# EAGLE board Schema (EAGLE 9.6.2)
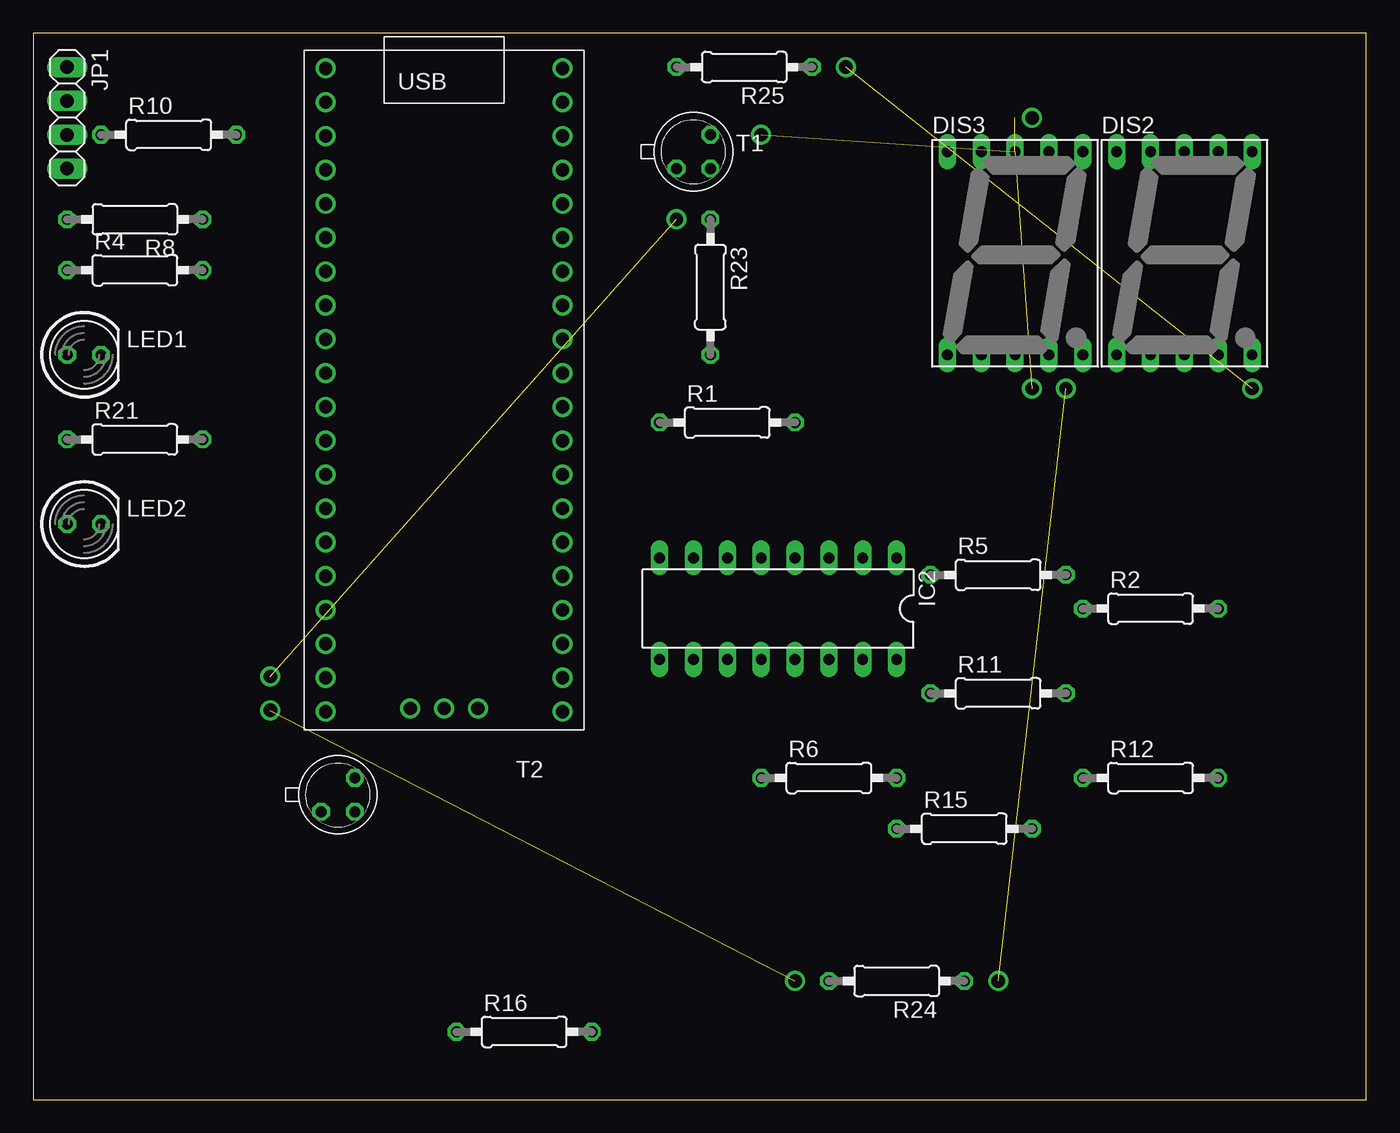
[diagram p0: board, top side]
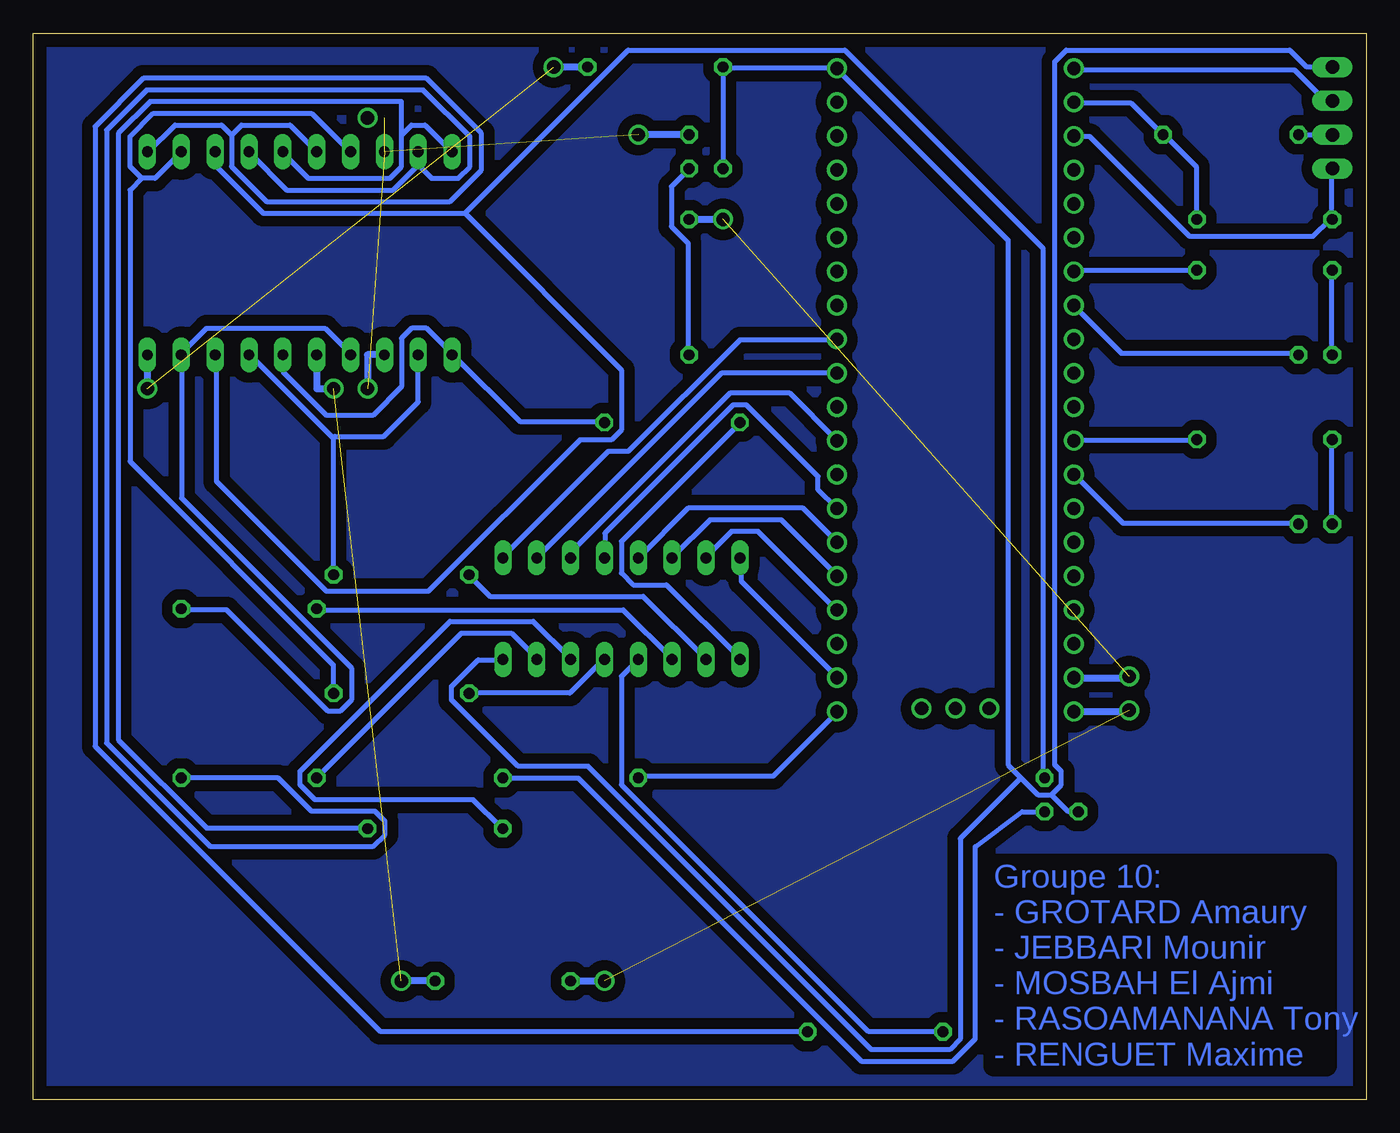
[diagram p1: board, bottom side, seen from below]

Size 100 x 80 mm. Coordinates in mm from the lower left corner, seen from the top.
Outline: 0,0 100,0 100,80 0,80 0,0
Copper layers (1*16): Top 0.035mm / dielectric 1.5mm / Bottom 0.035mm
Design rules "default *": minimum track width 15mil, minimum drill 0.35mm, track to track 15mil, track to pad 15mil, pad to pad 15mil, via to via 15mil, smd to smd 6mil, copper to edge 40mil, drill to drill 6mil, minimum pad ring 10mil, minimum via ring 8mil, stop-mask expansion 4mil, vias tented up to drill 0mil, thermal gap 10mil

## Footprints (pad centres in the part's own frame; a part is rotated, then mirrored left to right if it is on the bottom)
HDSP-M = drill 0.813 long: 1 -5.08,-7.62; 2 -2.54,-7.62; 3 0,-7.62; 4 2.54,-7.62; 5 5.08,-7.62; 6 5.08,7.62; 7 2.54,7.62; 8 0,7.62; 9 -2.54,7.62; 10 -5.08,7.62
DIL16 = drill 0.813 long: 1 -8.89,-3.81; 2 -6.35,-3.81; 3 -3.81,-3.81; 4 -1.27,-3.81; 5 1.27,-3.81; 6 3.81,-3.81; 7 6.35,-3.81; 8 8.89,-3.81; 9 8.89,3.81; 10 6.35,3.81; 11 3.81,3.81; 12 1.27,3.81; 13 -1.27,3.81; 14 -3.81,3.81; 15 -6.35,3.81; 16 -8.89,3.81
1X04 = drill 1.016 long: 1 -3.81,0; 2 -1.27,0; 3 1.27,0; 4 3.81,0
LED5MM = drill 0.813 octagon: A -1.27,0; K 1.27,0
0207/10 = drill 0.813 octagon: 1 -5.08,0; 2 5.08,0
TO18 = drill 0.813 octagon: 1 -1.27,-1.27; 2 1.27,-1.27; 3 1.27,1.27
FT_RASPBERRY-PI-PICO_TH = drill 1: 1 -8.55,24.03; 2 -8.55,21.49; 3 -8.55,18.95; 4 -8.55,16.41; 5 -8.55,13.87; 6 -8.55,11.33; 7 -8.55,8.79; 8 -8.55,6.25; 9 -8.55,3.71; 10 -8.55,1.17; 11 -8.55,-1.37; 12 -8.55,-3.91; 13 -8.55,-6.45; 14 -8.55,-8.99; 15 -8.55,-11.53; 16 -8.55,-14.07; 17 -8.55,-16.61; 18 -8.55,-19.15; 19 -8.55,-21.69; 20 -8.55,-24.23; 21 9.23,-24.23; 22 9.23,-21.69; 23 9.23,-19.15; 24 9.23,-16.61; 25 9.23,-14.07; 26 9.23,-11.53; 27 9.23,-8.99; 28 9.23,-6.45; 29 9.23,-3.91; 30 9.23,-1.37; 31 9.23,1.17; 32 9.23,3.71; 33 9.23,6.25; 34 9.23,8.79; 35 9.23,11.33; 36 9.23,13.87; 37 9.23,16.41; 38 9.23,18.95; 39 9.23,21.49; 40 9.23,24.03; GND 0.34,-24; SWCLK -2.2,-24; SWDIO 2.88,-24

## Placement (x,y rotation side)
DIS2  HD-H101  [HDSP-M]  86.36,63.5 0 top
DIS3  HD-H101  [HDSP-M]  73.66,63.5 0 top
IC2  [DIL16]  55.88,36.83 180 top
JP1  [1X04]  2.54,73.66 270 top
LED1  [LED5MM]  3.81,55.88 0 top
LED2  [LED5MM]  3.81,43.18 0 top
R1  [0207/10]  52.07,50.8 0 top
R2  [0207/10]  83.82,36.83 0 top
R4  [0207/10]  7.62,62.23 0 top
R5  [0207/10]  72.39,39.37 0 top
R6  [0207/10]  59.69,24.13 0 top
R8  [0207/10]  7.62,66.04 180 top
R10  [0207/10]  10.16,72.39 0 top
R11  [0207/10]  72.39,30.48 0 top
R12  [0207/10]  83.82,24.13 0 top
R15  [0207/10]  69.85,20.32 0 top
R16  [0207/10]  36.83,5.08 0 top
R21  [0207/10]  7.62,49.53 0 top
R23  [0207/10]  50.8,60.96 270 top
R24  [0207/10]  64.77,8.89 180 top
R25  [0207/10]  53.34,77.47 180 top
T1  2N2222  [TO18]  49.53,71.12 0 top
T2  2N2222  [TO18]  22.86,22.86 0 top
U$1  RASPBERRY-PI-PICO_TH  [FT_RASPBERRY-PI-PICO_TH]  30.48,53.34 0 top

## Library data of the parts
DIS2 DIS3 = display-hp; OC_FARNELL: unknown; OC_NEWARK: unknown
IC2 = ic-package
JP1 = pinhead
LED1 LED2 = led
R1 R2 R4-R6 R8 R10-R12 R15 R16 R21 R23-R25 = rcl; SPICEPREFIX: R
T1 T2 = transistor
U$1 = pipico

## Nets
9E: DIS2.1 DIS3.1 R1.2
10D: DIS2.2 DIS3.2 R5.2
11C: DIS2.4 DIS3.4 R2.2
12B: DIS2.6 DIS3.6 R16.2
13A: DIS2.7 DIS3.7 R11.2
14G: DIS2.10 DIS3.10 R15.2
15F: DIS2.9 DIS3.9 R12.2
19TOTR: R23.1 U$1.19
DOT: R24.2 U$1.20
N$1: IC2.8 U$1.22
N$2: JP1.4 R8.2 U$1.3
N$3: R8.1 R10.2 U$1.2
N$4: JP1.2 U$1.1
N$5: JP1.3 R10.1
N$6: R4.2 U$1.7
N$7: LED1.A R4.1
N$8: LED1.K U$1.8
N$9: IC2.1 U$1.32
N$10: IC2.2 U$1.31
N$11: IC2.7 U$1.24
N$12: IC2.6 U$1.25
N$13: IC2.5 U$1.26
N$14: IC2.4 U$1.27
N$15: IC2.3 U$1.29
N$16: IC2.15 R12.1
N$17: IC2.14 R15.1
N$18: R6.1 U$1.21
N$19: IC2.13 R11.1
N$20: IC2.12 R16.1
N$21: IC2.11 R2.1
N$22: IC2.10 R5.1
N$23: IC2.9 R1.1
N$24: R23.2 T1.2
N$25: DIS3.3 DIS3.8 T1.3
N$26: R21.2 U$1.12
N$27: LED2.A R21.1
N$28: LED2.K U$1.13
N$29: DIS2.3 DIS2.8 T2.3
N$30: R6.2 T2.2
N$31: DIS2.5 R25.1
N$33: DIS3.5 R24.1
VCC: IC2.16 JP1.1 R25.2 T1.1 T2.1 U$1.40

## Tracks (layer width: path | path; a pad name or v marks a point on that pad's centre or on a via)
9E
  Bottom 0.381: R1.2 57.25,50.88 63.5,50.88 68.5,55.88 DIS3.1 68.62,56 70.5,57.88 71.62,57.88 72.38,57.12 72.38,53.48 74.52,51.34 77.98,51.34 81.28,54.63 DIS2.1
10D
  Bottom 0.381: 77.5,49.62 77.5,39.38 R5.2 | 77.5,49.62 83.75,55.88 DIS2.2 | DIS3.2 71.12,52.34 73.71,49.75 77.38,49.75 77.5,49.62
11C
  Bottom 0.381: DIS3.4 76.25,56 78.12,57.88 87,57.88 88.88,56 DIS2.4 88.88,55.75 88.88,45.12 76.12,32.38 76.12,30 77,29.12 77.88,29.12 85.5,36.75 88.88,36.75 R2.2
12B
  Bottom 0.381: 85.12,72.38 85.12,70 82.5,67.38 68.75,67.38 66.38,69.75 66.38,72.5 70.5,76.62 91.75,76.62 95.38,73 95.38,26.5 74,5.12 42,5.12 R16.2 | 85.12,72.38 85.88,73.12 89.38,73.12 91.38,71.12 DIS2.6 | 85.12,72.38 84.38,73.12 80.75,73.12 DIS3.6
13A
  Bottom 0.381: 91.88,69.12 92.75,70 92.75,72.25 91,74 79.12,74 76.25,71.12 DIS3.7 | 91.88,69.12 90.88,69.12 89,71 DIS2.7 | 91.88,69.12 92.75,68.25 92.75,47.88 77.5,32.62 77.5,30.5 R11.2
14G
  Bottom 0.381: 72.38,72.38 71.62,73.12 70.62,73.12 68.62,71.12 DIS3.10 | 72.38,72.38 72.38,70 73.25,69.12 79.38,69.12 81.25,71 DIS2.10 | 72.38,72.38 72.38,74.88 91.25,74.88 93.62,72.5 93.62,27 87,20.38 75,20.38 R15.2
15F
  Bottom 0.381: DIS2.9 83.75,71 81,68.25 73,68.25 71.12,70.12 71.12,71 DIS3.9 71,70 70.12,69.12 68.12,69.12 67.25,70 67.25,72.25 70.75,75.75 91.5,75.75 94.5,72.75 94.5,26.75 86.75,19 74.5,19 73.62,19.88 73.62,20.88 74.38,21.62 79.12,21.62 81.62,24.12 88.88,24.12 R12.2
19TOTR  (1 unrouted)
  Bottom 0.508: R23.1 48.26,66.04 | U$1.19 17.78,31.65 17.78,31.75
DOT  (1 unrouted)
  Bottom 0.508: R24.2 57.15,8.89 | U$1.20 17.78,29.11 17.78,29.21
GND
  pour Bottom (isolate 0.8): 0,80.01 100.33,80.01 100.33,0 0,0
N$1
  Bottom 0.381: IC2.8 46.88,40.62 46.88,38.88 39.75,31.75 U$1.22
N$2
  Bottom 0.381: JP1.4 2.62,69.75 2.62,66.12 R8.2 2.75,66 4,64.75 13.25,64.75 20.75,72.25 21.88,72.25 U$1.3
N$3
  Bottom 0.381: R8.1 12.75,66.12 12.75,70 15.12,72.38 R10.2 15.38,72.5 17.62,74.75 21.88,74.75 U$1.2
N$4
  Bottom 0.381: U$1.1 21.88,77.25 5.38,77.25 3.12,75 2.62,75 JP1.2
N$5
  Bottom 0.381: R10.1 5,72.38 2.62,72.38 JP1.3
N$6
  Bottom 0.381: R4.2 12.75,62.25 21.88,62.25 U$1.7
N$7
  Bottom 0.381: LED1.A 2.62,56 2.62,62.12 R4.1
N$8
  Bottom 0.381: LED1.K 5.12,56 18.38,56 21.88,59.5 U$1.8
N$9
  Bottom 0.381: IC2.1 64.75,40.75 56.88,48.62 55.38,48.62 47,57 39.75,57 U$1.32
N$10
  Bottom 0.381: IC2.2 62.12,40.75 48.38,54.5 39.75,54.5 U$1.31
N$11
  Bottom 0.381: IC2.7 49.5,40.75 47.62,42.62 45.62,42.62 39.75,36.75 U$1.24
N$12
  Bottom 0.381: IC2.6 52,40.75 49.25,43.5 43.88,43.5 39.75,39.38 U$1.25
N$13
  Bottom 0.381: IC2.5 50.88,44.38 42.25,44.38 39.75,41.88 U$1.26
N$14
  Bottom 0.381: IC2.4 57.12,40.75 57.12,42.5 47.5,52.12 46.5,52.12 41.12,46.75 41.12,45.75 39.75,44.38 U$1.27
N$15
  Bottom 0.381: IC2.3 59.62,40.75 59.62,41.12 47.75,53 43.25,53 39.75,49.5 U$1.29
N$16
  Bottom 0.381: IC2.15 62.25,33.12 64.12,35 67.88,35 78.62,24.25 R12.1
N$17
  Bottom 0.381: IC2.14 59.75,33.12 62.5,35.88 68.75,35.88 80,24.62 80,23.62 78.88,22.5 67,22.5 64.88,20.38 R15.1
N$18
  Bottom 0.381: R6.1 54.5,24.25 44.5,24.25 39.75,29 U$1.21
N$19
  Bottom 0.381: R11.1 67.25,30.5 59.75,30.5 57.25,33 IC2.13
N$20
  Bottom 0.381: R16.1 31.75,5.12 37.38,5.12 55.88,23.62 55.88,31.75 54.62,33 IC2.12
N$21
  Bottom 0.381: IC2.11 52.12,33.12 55.75,36.75 78.62,36.75 R2.1
N$22
  Bottom 0.381: IC2.10 49.62,33.12 54.25,37.75 65.75,37.75 67.25,39.25 R5.1
N$23
  Bottom 0.381: IC2.9 47,33.12 52.5,38.62 55,38.62 55.88,39.5 55.88,41.88 47,50.75 R1.1
N$24
  Bottom 0.381: R23.2 50.88,56 50.88,64.25 52.12,65.5 52.12,68.5 50.88,69.75 T1.2
N$25  (3 unrouted)
  Bottom 0.508: T1.3 54.61,72.39 | DIS3.3 74.93,55.88 74.93,53.34
N$26
  Bottom 0.381: R21.2 12.75,49.5 21.88,49.5 U$1.12
N$27
  Bottom 0.381: LED2.A 2.62,43.25 2.62,49.5 R21.1
N$28
  Bottom 0.381: LED2.K 5.12,43.25 18.25,43.25 21.88,46.88 U$1.13
N$29
  Bottom 0.381: 67.62,66.5 55.38,78.75 39.12,78.75 24.25,63.88 24.25,24.25 T2.3 | 67.62,66.5 82.75,66.5 86.25,70 86.25,71 DIS2.8 | 67.62,66.5 55.88,54.75 55.88,50.25 56.62,49.5 59,49.5 70.38,38.12 78,38.12 86.25,46.38 86.25,55.88 DIS2.3
N$30
  Bottom 0.381: T2.2 25.82,21.59 29.33,18.96 29.33,4.54 31,2.88 37.88,2.88 59.12,24.12 64.75,24.12 R6.2
N$31  (1 unrouted)
  Bottom 0.508: R25.1 60.96,77.47 | DIS2.5 91.44,53.34
N$33  (1 unrouted)
  Bottom 0.508: DIS3.5 78.74,53.34 77.47,53.34 | R24.1 72.39,8.89
S$1  (via drill 1 pad 1.3)
  other vias: 17.78,29.21
S$2  (via drill 1 pad 1.3)
  other vias: 17.78,31.75
S$3  (via drill 1 pad 1.3)
  other vias: 57.15,8.89
S$4  (via drill 1 pad 1.3)
  other vias: 72.39,8.89
S$5  (via drill 1 pad 1.3)
  other vias: 48.26,66.04
S$6  (via drill 1 pad 1.3)
  other vias: 54.61,72.39
S$7  (via drill 1 pad 1.3)
  other vias: 77.47,53.34
S$8  (via drill 1 pad 1.3)
  other vias: 74.93,53.34
S$9  (via drill 1 pad 1.3)
  other vias: 91.44,53.34
S$10  (via drill 1 pad 1.3)
  other vias: 74.93,73.66
S$11  (via drill 1 pad 1.3)
  other vias: 60.96,77.47
VCC
  Bottom 0.381: T1.1 48.25,69.88 48.25,77.38 R25.2 48.12,77.38 39.88,77.38 U$1.40 39.62,77.25 26.88,64.5 26.88,25.12 25.89,24.14 | 23.62,22.88 22.38,21.62 21.62,21.62 T2.1 | 23.62,22.88 24.62,22.88 25.89,24.14 | 25.89,24.14 30.45,19.59 30.45,4.54 31.25,3.75 37.12,3.75 58.38,25 63.62,25 68.62,30 68.62,31 66.62,33 64.88,33 IC2.16 | 23.62,22.88 22.88,23.62 22.88,24.62 23.38,25.12 23.38,77.88 22.5,78.75 5.75,78.75 4.5,77.5 2.62,77.5 JP1.1

## Text on the board
Bottom: Groupe 10: / - GROTARD Amaury / - JEBBARI Mounir / - MOSBAH El Ajmi / - RASOAMANANA Tony / - RENGUET Maxime